# EAGLE board DC motor with Ultrasonic sensor 2 (EAGLE 9.7.0)

Size 215.85 x 213.43 mm. Coordinates in mm from the lower left corner, seen from the top.
Outline: 0,0 215.85,0 215.85,213.43 0,213.43 0,0
Copper layers (1*16): Top 0.035mm / dielectric 1.5mm / Bottom 0.035mm
Design rules "default": minimum track width 6mil, minimum drill 0.35mm, track to track 6mil, track to pad 6mil, pad to pad 6mil, via to via 6mil, smd to smd 6mil, copper to edge 40mil, drill to drill 6mil, minimum pad ring 10mil, minimum via ring 8mil, stop-mask expansion 4mil, vias tented up to drill 0mil, thermal gap 10mil

## Footprints (pad centres in the part's own frame; a part is rotated, then mirrored left to right if it is on the bottom)
BATTERY-GENERIC = drill 1.118 pad 3.15 octagon: + 2.54,0; - -2.54,0
HC-SR04 = drill 1.016 long: 1 -3.81,0; 2 -1.27,0; 3 1.27,0; 4 3.81,0
MOTOR = drill 1.118 pad 3.15 octagon: + 2.54,0; - -2.54,0
SG90 = drill 1.016 long: 1 -2.54,0; 2 0,0; 3 2.54,0
ARDUINO-UNO-R3-SHIELD = drill 1.016 pad 1.88: 3.3V 24.13,-2.54; 5V 24.13,0; A0 24.13,12.7; A1 24.13,15.24; A2 24.13,17.78; A3 24.13,20.32; A4 24.13,22.86; A5 24.13,25.4; AREF -24.13,-13.97; D2 -24.13,20.32; D3 -24.13,17.78; D4 -24.13,15.24; D5 -24.13,12.7; D6 -24.13,10.16; D7 -24.13,7.62; D8 -24.13,3.81; D9 -24.13,1.27; D10 -24.13,-1.27; D11 -24.13,-3.81; D12 -24.13,-6.35; D13 -24.13,-8.89; GND@0 24.13,2.54; GND@1 24.13,5.08; GND@2 -24.13,-11.43; IOREF 24.13,-7.62; NC 24.13,-10.16; RES 24.13,-5.08; RX -24.13,25.4; SCL -24.13,-19.05; SDA -24.13,-16.51; TX -24.13,22.86; VIN 24.13,7.62
DIP762W53P254L1969H508Q16B = drill 0.743 pad 1.343: 1 -3.81,8.89; 2 -3.81,6.35; 3 -3.81,3.81; 4 -3.81,1.27; 5 -3.81,-1.27; 6 -3.81,-3.81; 7 -3.81,-6.35; 8 -3.81,-8.89; 9 3.81,-8.89; 10 3.81,-6.35; 11 3.81,-3.81; 12 3.81,-1.27; 13 3.81,1.27; 14 3.81,3.81; 15 3.81,6.35; 16 3.81,8.89

## Placement (x,y rotation side)
BAT1  9V  [BATTERY-GENERIC]  207.6,115.61 90 top
DIST1  DISTANCE-SENSOR-4PINHC-SR04  [HC-SR04]  129.36,143.17 0 top
M1  MOTOR_HDR  [MOTOR]  16.34,205.17 0 top
M2  MOTOR_HDR  [MOTOR]  15.25,103.37 180 top
M3  MOTOR_HDR  [MOTOR]  55.6,83.84 0 top
M4  MOTOR_HDR  [MOTOR]  55.49,8.26 180 top
SERVO1  SERVOSG90  [SG90]  180.26,149.83 180 top
U1  ARDUINO-UNO-R3-SHIELD  [ARDUINO-UNO-R3-SHIELD]  161.14,77 90 top
U2  L293E  [DIP762W53P254L1969H508Q16B]  55.77,46.8 90 top
U21  L293E  [DIP762W53P254L1969H508Q16B]  15.4,154.9 90 top

## Library data of the parts
BAT1 DIST1 M1-M4 SERVO1 U1 U2 U21 = Tinkercad

## Nets
BAT1+: BAT1.+ U1.VIN
BAT1-: BAT1.- DIST1.4 SERVO1.1 U1.GND@0 U1.GND@1 U1.GND@2 U2.4 U2.5 U2.12 U2.13 U21.4 U21.5 U21.12 U21.13
M1_+: M1.+ U21.11
M1_-: M1.- U21.14
M2_+: M2.+ U21.3
M2_-: M2.- U21.6
M3_+: M3.+ U2.11
M3_-: M3.- U2.14
M4_+: M4.+ U2.3
M4_-: M4.- U2.6
U1_5V: DIST1.1 SERVO1.2 U1.5V U2.8 U2.16 U21.8 U21.16
U1_A0: DIST1.2 U1.A0
U1_A1: DIST1.3 U1.A1
U1_A5: SERVO1.3 U1.A5
U1_D2: U1.D2 U2.2
U1_D3: U1.D3 U21.1
U1_D4: U1.D4 U2.7
U1_D5: U1.D5 U21.2
U1_D6: U1.D6 U21.9
U1_D7: U1.D7 U21.7
U1_D8: U1.D8 U21.15
U1_D9: U1.D9 U2.1
U1_D10: U1.D10 U21.10
U1_D11: U1.D11 U2.9
U1_D12: U1.D12 U2.15
U1_D13: U1.D13 U2.10

## Tracks (layer width: path | path; a pad name or v marks a point on that pad's centre or on a via)
BAT1+  (1 unrouted)
BAT1-  (13 unrouted)
M1_+  (1 unrouted)
M1_-  (1 unrouted)
M2_+  (1 unrouted)
M2_-  (1 unrouted)
M3_+  (1 unrouted)
M3_-  (1 unrouted)
M4_+  (1 unrouted)
M4_-  (1 unrouted)
U1_5V  (6 unrouted)
U1_A0  (1 unrouted)
U1_A1  (1 unrouted)
U1_A5  (1 unrouted)
U1_D2  (1 unrouted)
U1_D3  (1 unrouted)
U1_D4  (1 unrouted)
U1_D5  (1 unrouted)
U1_D6  (1 unrouted)
U1_D7  (1 unrouted)
U1_D8  (1 unrouted)
U1_D9  (1 unrouted)
U1_D10  (1 unrouted)
U1_D11  (1 unrouted)
U1_D12  (1 unrouted)
U1_D13  (1 unrouted)